# Altium PCB Pedal_Back.PcbDoc
Units mil, origin at the board's own origin, x right, y up, seen from the top; angles counter-clockwise.
Board outline 1417.32 x 1082.68 mil, 2 copper layers (Top Layer, Bottom Layer); 6 components, 5 nets, 34 pads, 0 vias.
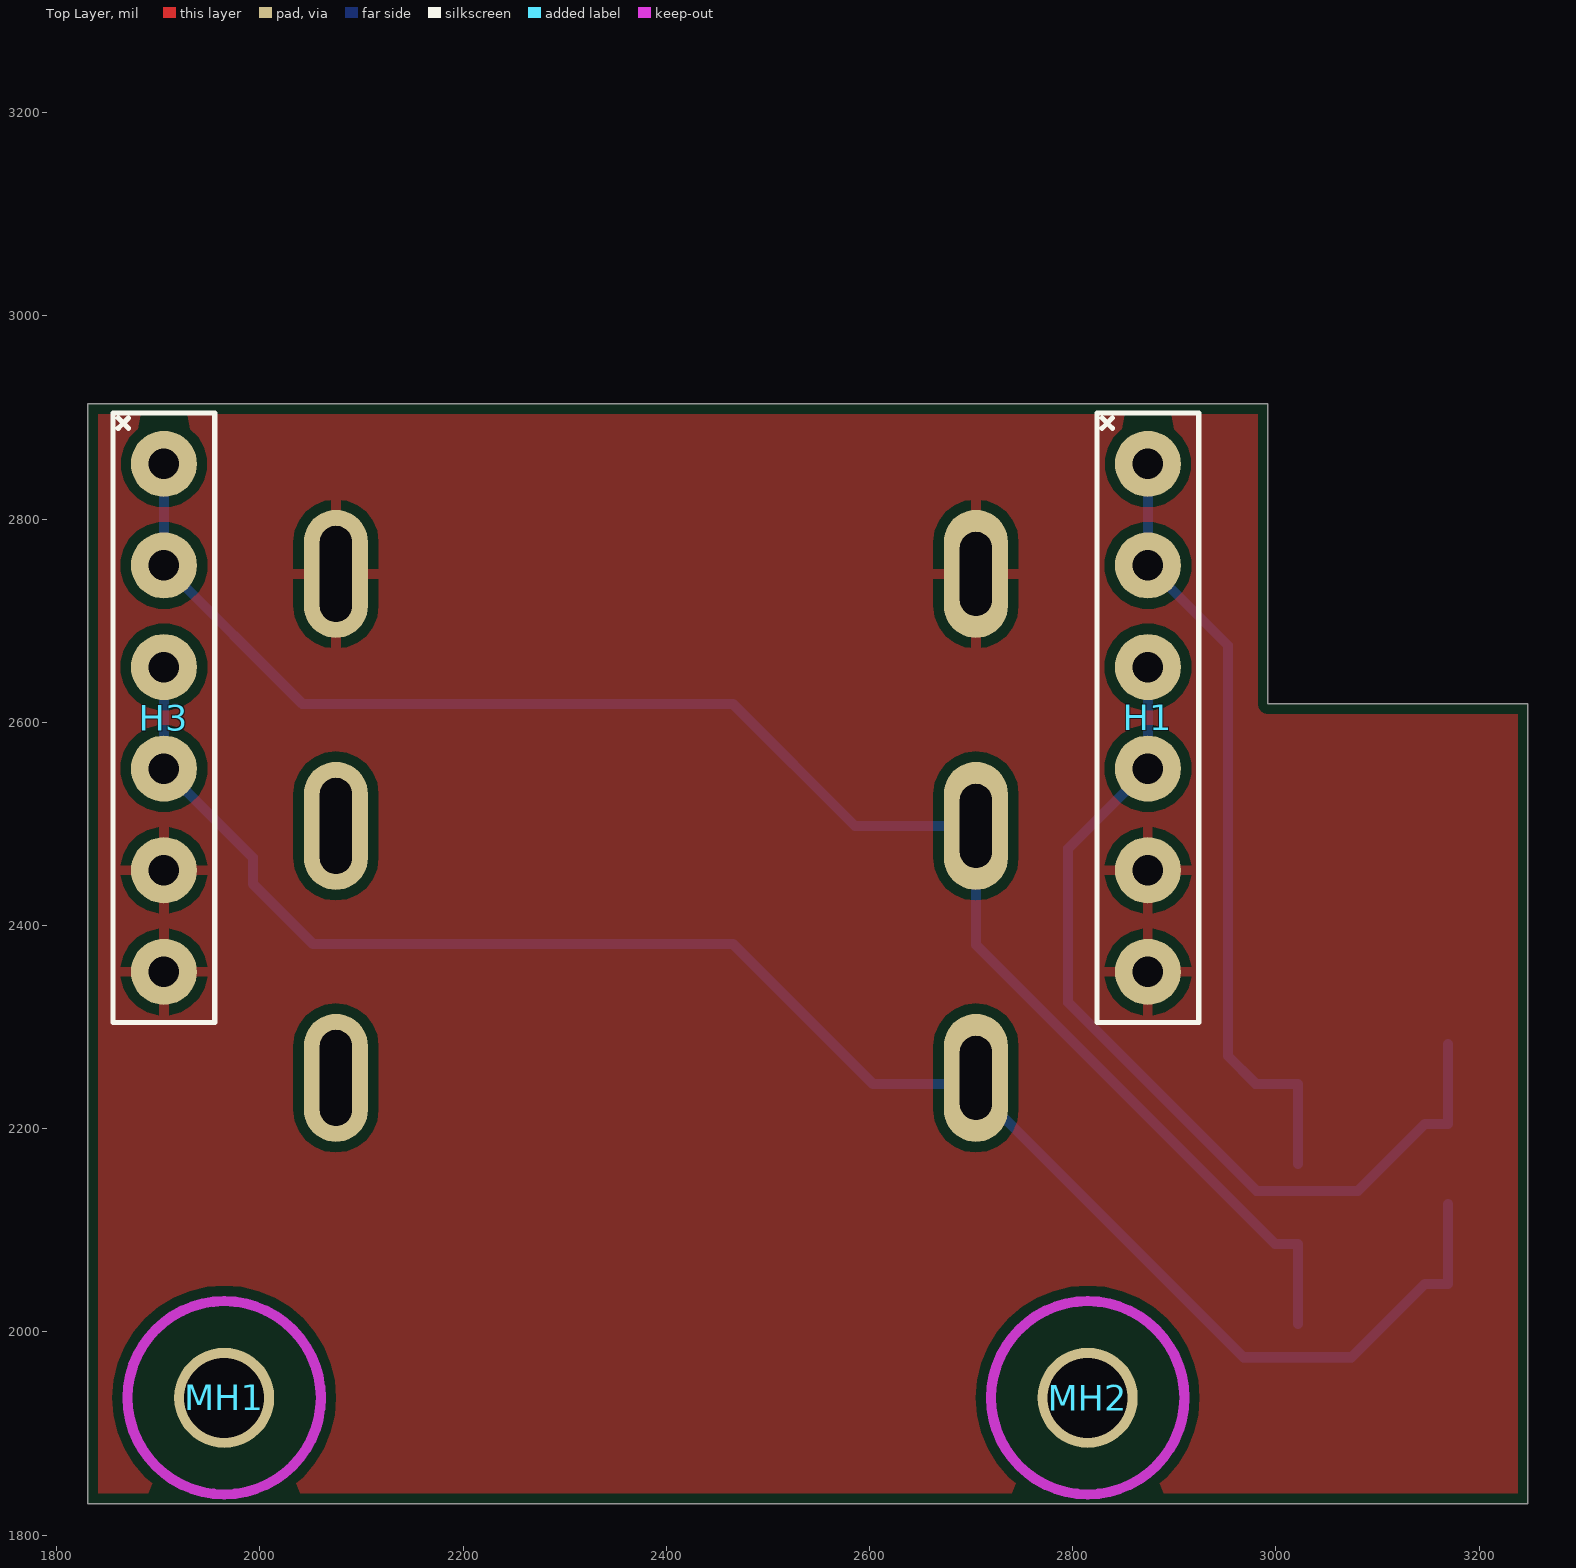
[diagram p0: Top Layer view]
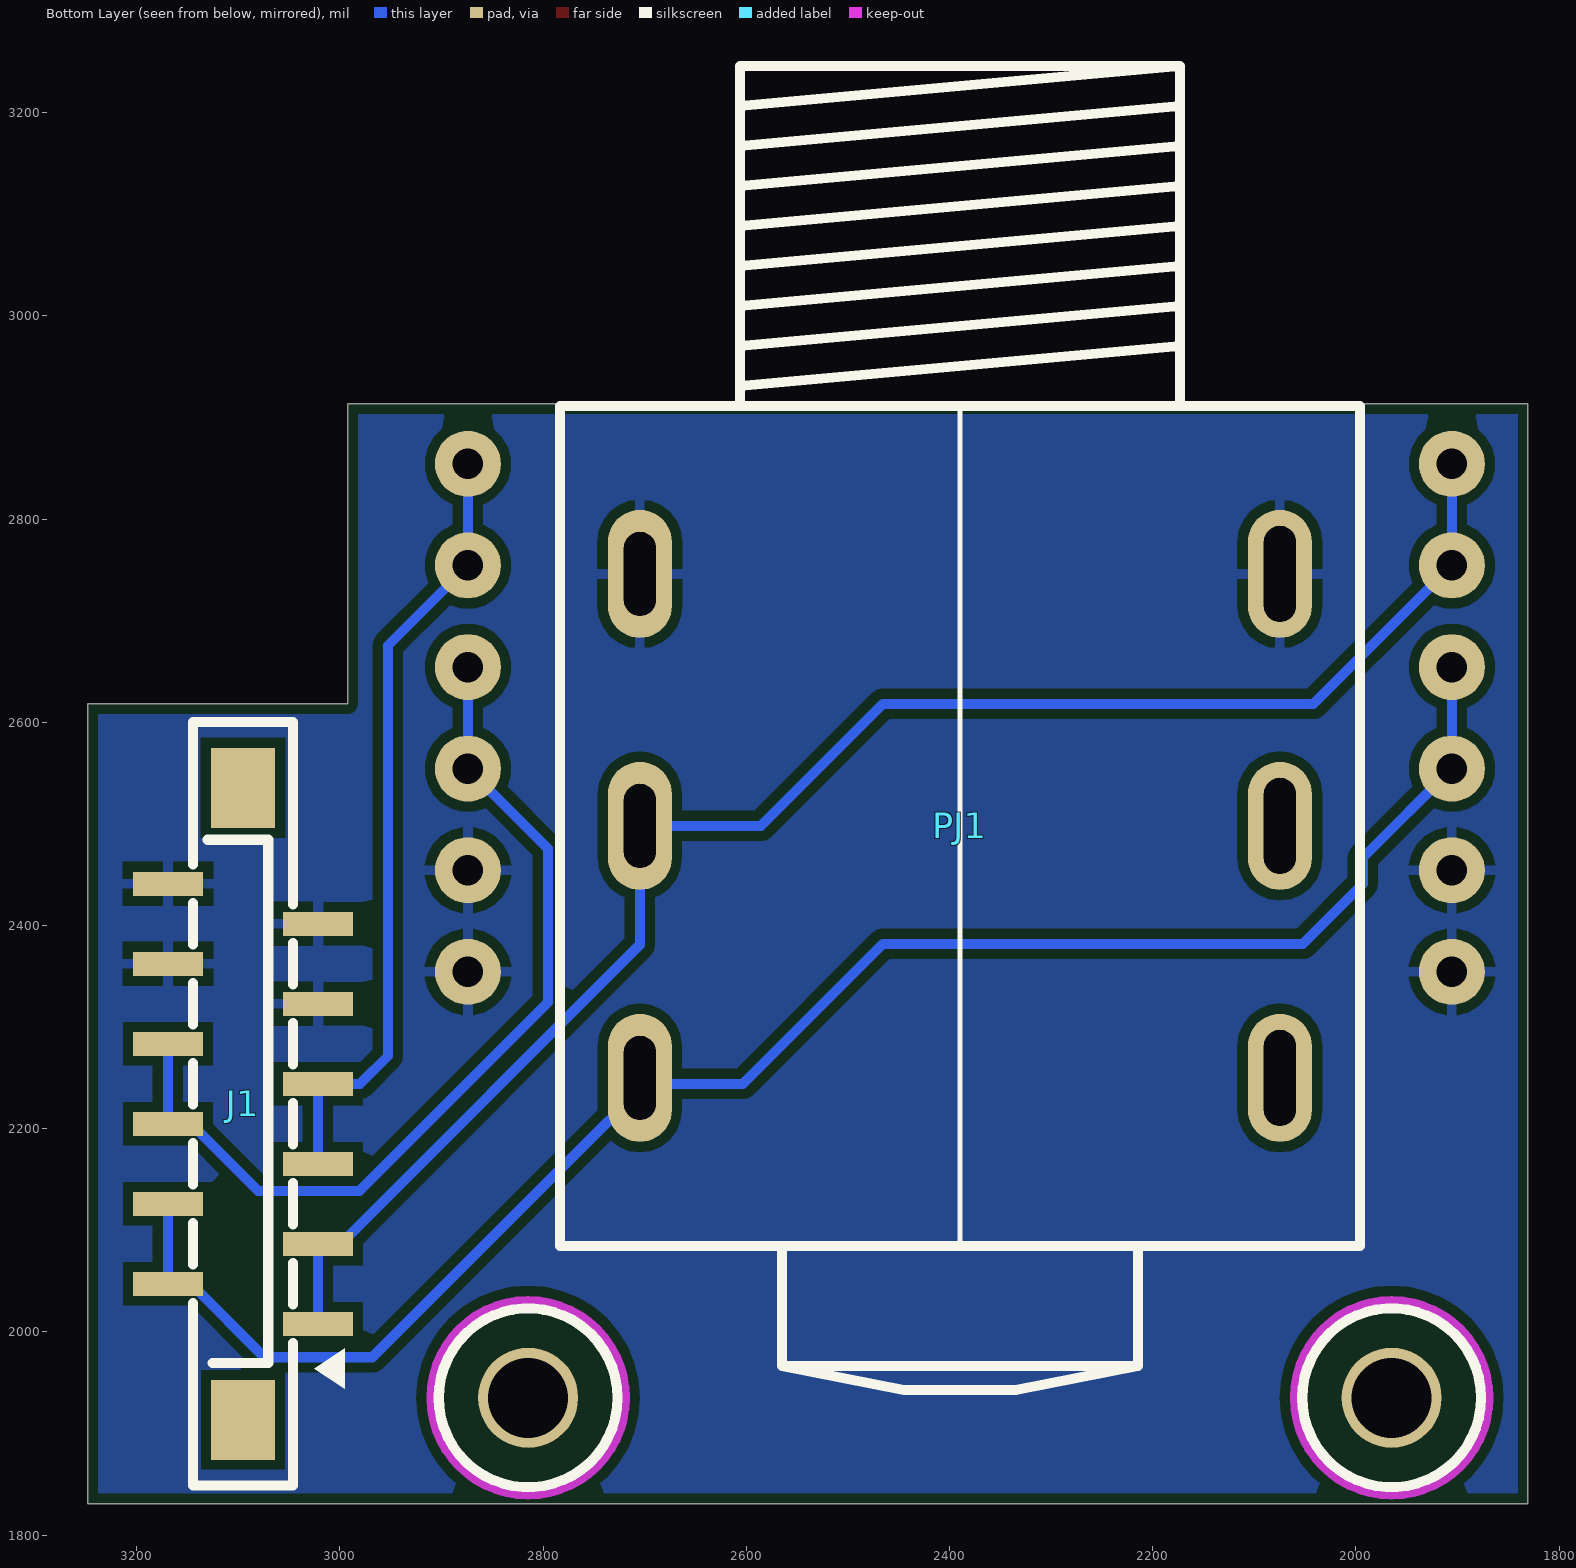
[diagram p1: Bottom Layer view, seen from below]

## Layer stack, top to bottom
Top Solder: solder mask 0.4, Solder Resist, Dk 3.5
Top Layer: signal copper 1.4
Dielectric 1: dielectric 12.6, FR-4, Dk 4.8
Bottom Layer: signal copper 1.4
Bottom Solder: solder mask 0.4, Solder Resist, Dk 3.5

## Board outline
1830.71,1830.71 3248.03,1830.71 3248.03,2618.11 2992.13,2618.11 2992.13,2913.39 1830.71,2913.39

## Design rules (kind name [scope] priority, off if disabled: settings)
BoardOutlineClearance [All] p1: gap=10 ignorepadtopadclearanceinfootprint=FALSE except(0: Arc-SplitContinuation Track-SplitContinuation SMDPad-SplitContinuation THPad-SplitContinuation Via-SplitContinuation Fill-SplitContinuation Poly-SplitContinuation Region-SplitContinuation Text-SplitContinuation)
Clearance [All] p1: gap=10 ignorepadtopadclearanceinfootprint=FALSE
PolygonConnect [All] p1: connectstyle=Relief reliefconductorwidth=10 reliefentries=4 polygonreliefangle="90 Angle" airgapwidth=10
RoutingVias [All] p1: holewidth=28 width=50 viastyle="Through Hole" minholewidth=28 minwidth=50 maxholewidth=28 maxwidth=50
SolderMaskExpansion [All] p1: expansion=4 istentingtop=FALSE
Width [All] p1: maxlimit=10 minlimit=10 preferedwidth=10
30 further rules are at their usual default settings.

## Components (designator, comment, footprint, x,y, rotation, side; value= is the part's Value field where it differs from the comment)
H1 "MB_HP_jack" header-6_male 2874.02,2854.33 r270 top
H3 "EXPR_jack" header-6_male 1905.56,2854.33 r270 top
J1 "0528081271" AFA11-S12GLA-00 3021.65,2007.87 r90 bottom
MH1 "MountingHole" Hole_2.5mm 1964.83,1935.11 r180 top
MH2 "MountingHole" Hole_2.5mm 2814.75,1935.11 r180 top
PJ1 "PJ-609AE" PJ609AE 2704.75,2745.96 r270 bottom

## Footprints (in the part's own frame and the unit in brackets; to place one, negate y for a bottom-side part, rotate by r counter-clockwise, add the part's x,y. Pads: shape width x height; smd on the part's side, far side on the other; paste and mask are expansions set on the pad)
AFA11-S12GLA-00 [mm]
  rect 0.6x1.75 smd paste+0 mask+0.05: 1(0,0) 2(1,3.75) 3(2,0) 4(3,3.75) 5(4,0) 6(5,3.75) 7(6,0) 8(7,3.75) 9(8,0) 10(9,3.75) 11(10,0) 12(11,3.75)
  rect 2x1.6 smd paste+0 mask+0.05: 13(13.4,1.875) 14(-2.4,1.875)
  silkscreen extent -4.04,-0.66 15.04,3.13, body extent -3.69,-0.35 14.71,4.16, height 5.35
header-6_male [mil]
  round 65 hole 30: 1(0,0) 2(100,0) 3(200,0) 4(300,0) 5(400,0) 6(500,0)
  silkscreen extent -50,-50 550,50, body extent -50,-50 550,50, height 339
Hole_2.5mm [mm]
  round 2.5 hole 2: 0(0,0)
  body extent -0.5,-0.5 0.5,0.5, height 0.5
PJ609AE [mm] "HOOYA"
  oval 3.2x1.6 hole 0.8 slot 2.1 at 0 deg paste-2539.97 mask+0.051: 2(0,0) 4(6.3,0) 6(12.6,0)
  oval 3.2x1.6 hole 0.8 slot 2.4 at 0 deg paste-2539.97 mask+0.051: 3(0,16) 5(6.3,16) 7(12.6,16)
  silkscreen extent -12.7,-2 20.4,18, body extent -12.16,-1.4 21.2,17.09, height 16.2

## Part data
H1 H3: library part arduino_header_6
  H1: System=Connector
J1: "Connector", Manufacturer_Name=Molex, Datasheet Link=https://www.molex.com/pdm_docs/sd/528082071_sd.pdf, Height=5.3mm, Manufacturer_Part_Number=0528081271, System=Connector
PJ1: "6.3mm jack HOOYA"

## Nets (pads, with @x,y where several pads share a name; then routed paths per layer and width w, separated by ;. In a path a pad name is that pad's centre, name@x,y a point inside that pad or via, vN(x,y) a via of type N, cw(c..) or ccw(c..) an arc to the next point about the centre after c; other vN are vias at no path point)
GND_A: H1.5 H1.6 H3.5 H3.6 J1.9 J1.10 J1.11 J1.12 PJ1.2 PJ1.3
PH_LOUT1: H3.3 H3.4 J1.2 J1.4 PJ1.6 | length 1742.4
  Bottom Layer w10: H3.3@1905.55,2654.33 1905.55,2554.33 1993.08,2466.8 1993.08,2440.94 2052.14,2381.89 2465.52,2381.89 2603.32,2244.09 2698.94,2244.09 PJ1.6 2704.75,2232.75 2729.23,2208.27 2734.81,2208.27 2968.1,1974.98 3074.39,1974.98 3146.65,2047.24 J1.2 J1.4
PH_LOUT2: H1.3 H1.4 J1.6 J1.8 | length 919.8
  Bottom Layer w10: H1.3 H1.4 2795.28,2475.59 2795.28,2324.26 2980.99,2138.54 3080.47,2138.54 3146.65,2204.72 J1.6 J1.8
PH_ROUT1: H3.1 H3.2 J1.1 J1.3 PJ1.4 | length 1640
  Bottom Layer w10: H3.1@1905.55,2854.33 1905.55,2754.33 2041.77,2618.11 2465.52,2618.11 2585.7,2497.93 PJ1.4 2704.75,2380.88 2999.02,2086.61 J1.3 J1.1
PH_ROUT2: H1.1 H1.2 J1.5 J1.7 | length 774.4
  Bottom Layer w10: H1.1 H1.2 2952.76,2675.59 2952.76,2271.54 2980.2,2244.09 J1.7 J1.5
pads on no net: J1.13 J1.14 MH1.0 MH2.0 PJ1.5 PJ1.7

## Polygon pours and split planes (outlines as drawn)
GND_A on Top Layer "NONET_L02_P-001" (solid, remove dead copper, pour order 2): 1830.71,2913.39 1830.71,1830.71 3248.03,1830.71 3248.03,2913.39
GND_A on Bottom Layer "NONET_L02_P-001" (solid, remove dead copper, pour order 5): 1830.71,2913.39 1830.71,1830.71 3248.03,1830.71 3248.03,2913.39

## Keep-outs
Keep-Out Layer:
  circle w10: c2814.75,1935.11 r95.14
  circle w10: c1964.83,1935.11 r95.14

## Silkscreen, mask and mechanical layers (free items; w line width, h text height)
Bottom Overlay:
  circle w10: c2814.75,1935.11 r88.03
  circle w10: c2814.75,1935.11 r88.03
  circle w10: c1964.83,1935.11 r88.03
Board Shape:
  lines w3.94: 6574.8,1830.71 6574.8,2913.39 ; 1830.71,1830.71 3248.03,1830.71 3248.03,2263.78 3248.03,2618.11 2992.13,2618.11 2992.13,2913.39 1830.71,2913.39 1830.71,1830.71